# Altium PCB Bagryanets.PcbDoc
Units mm, origin at the board's own origin, x right, y up, seen from the top; angles counter-clockwise.
Board outline 60 x 79 mm, 2 copper layers (Top Layer, Bottom Layer), stack 1.236 mm thick; 82 components, 55 nets, 281 pads, 1 vias.
Unrouted connection lines stored in the file: 162.
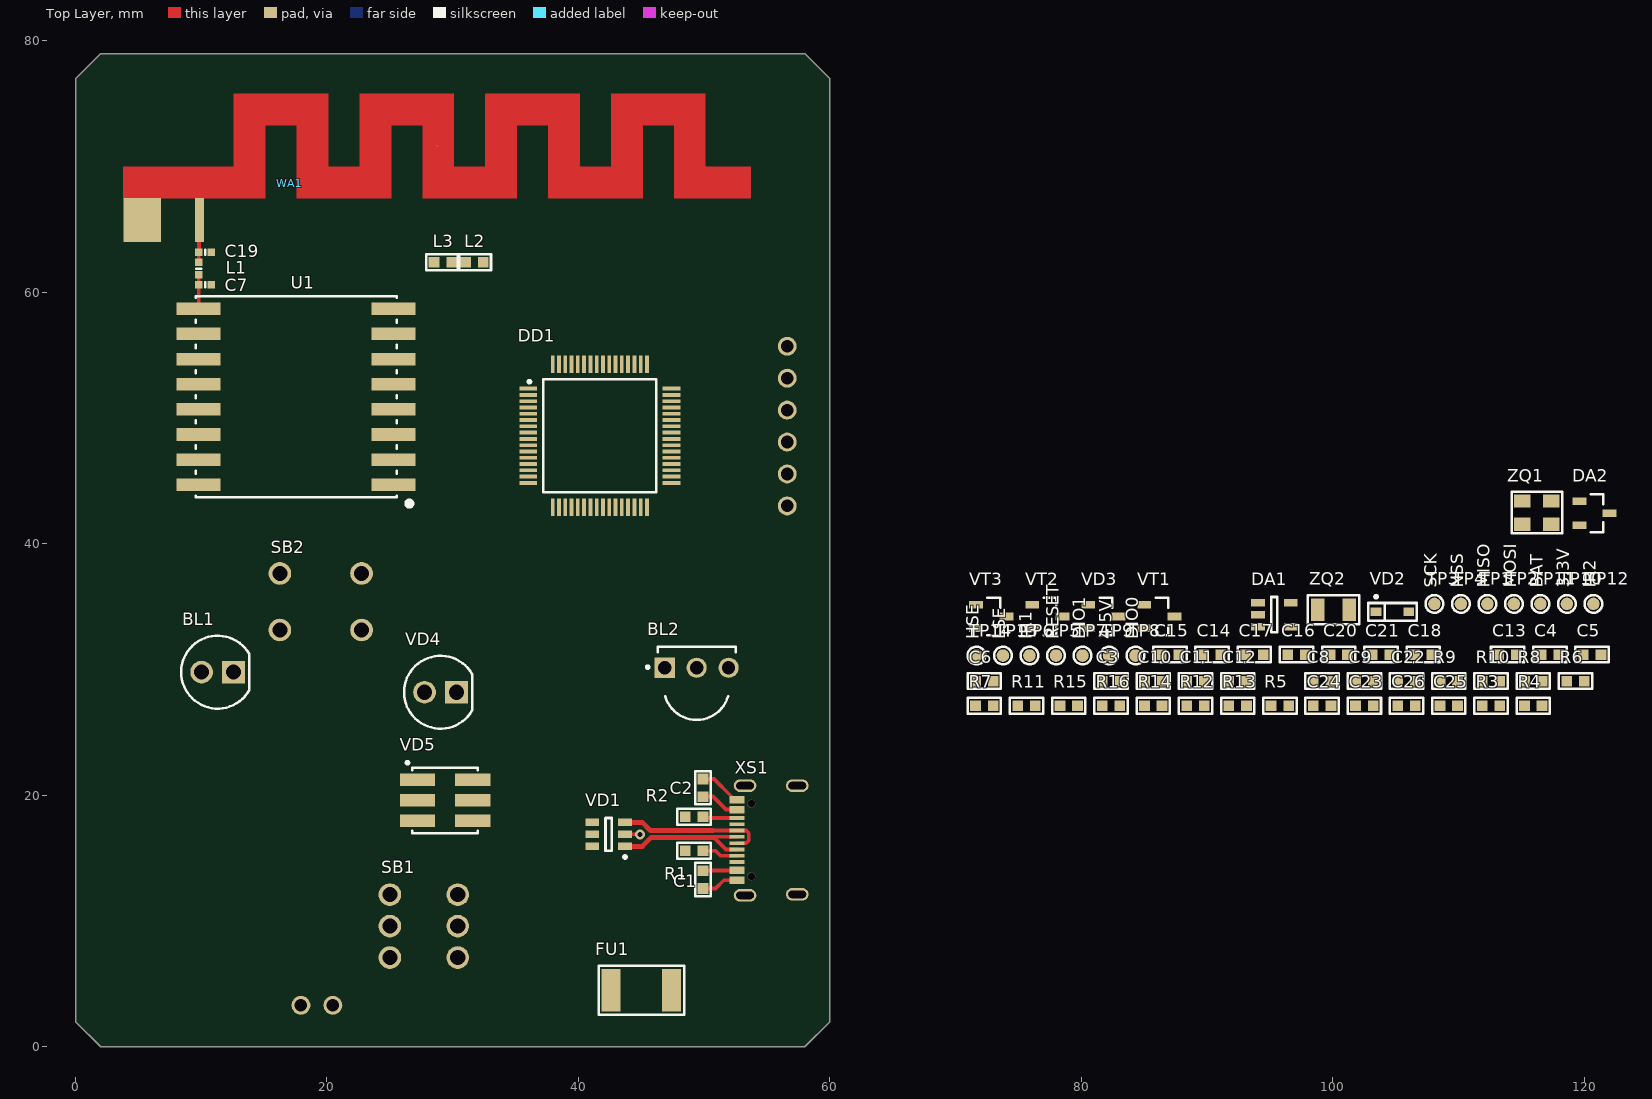
[diagram p0: Top Layer view]
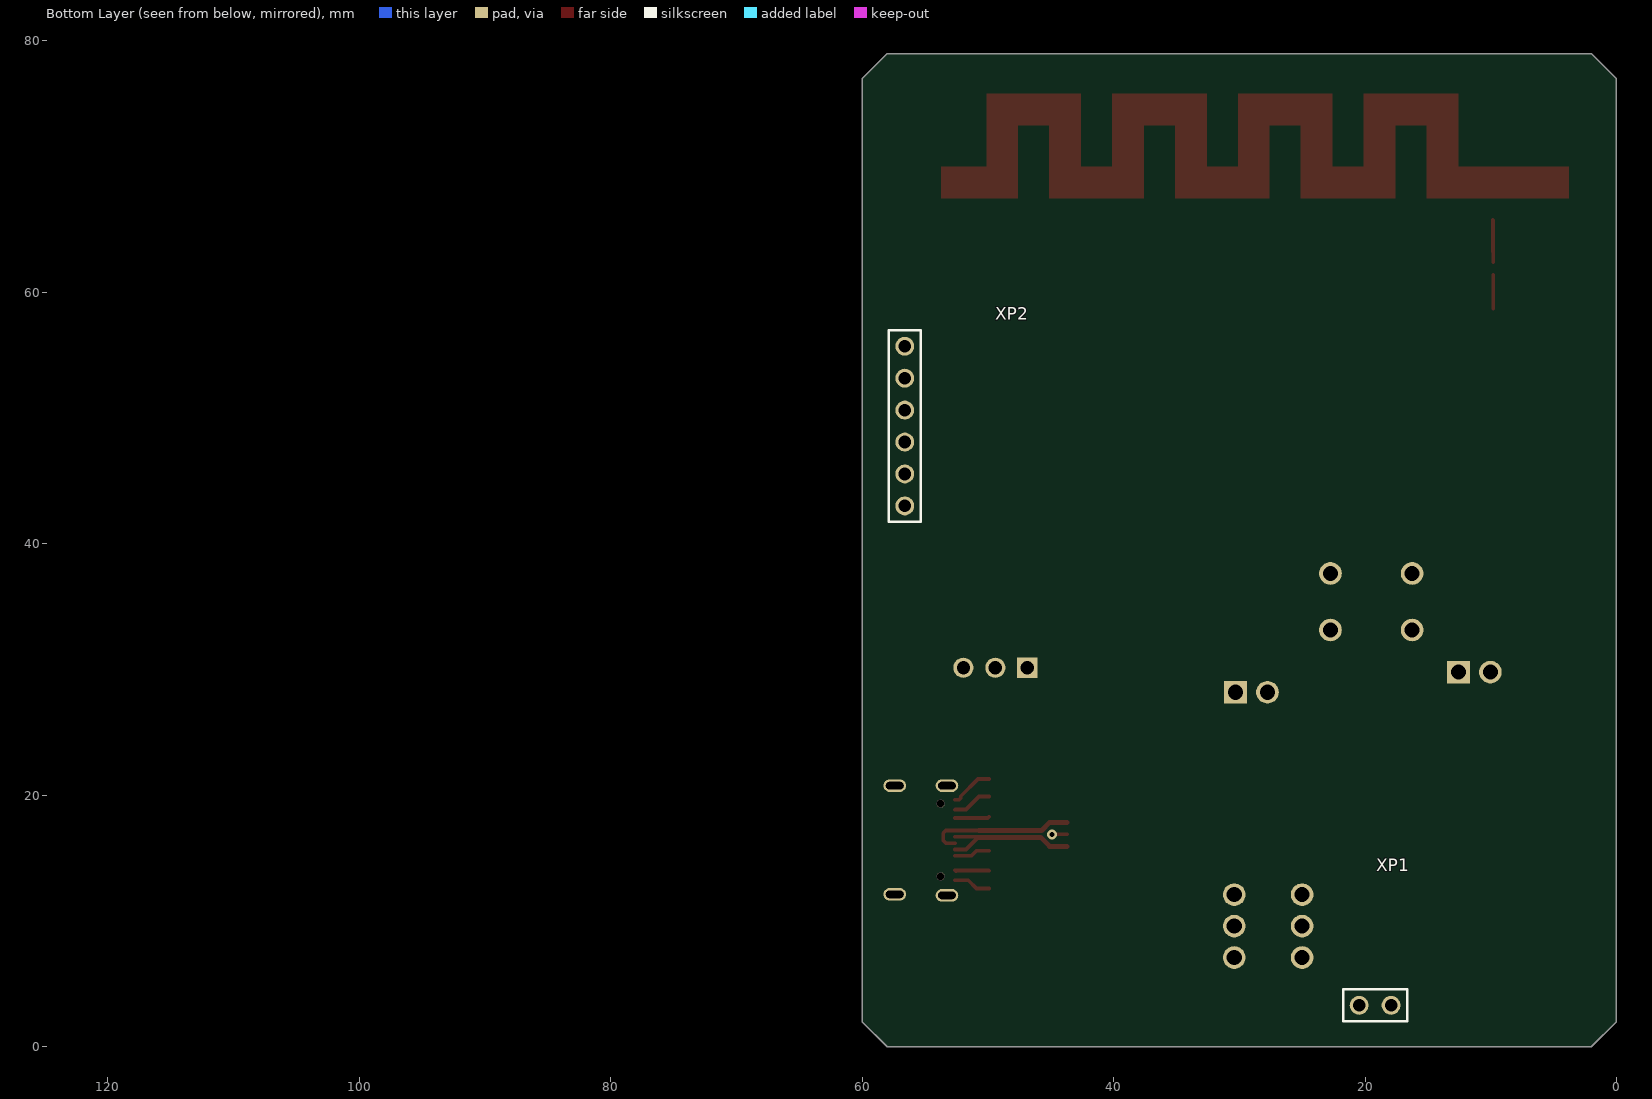
[diagram p1: Bottom Layer view, seen from below]

## Layer stack, top to bottom
Top Solder: solder mask 0.01, Solder Resist, Dk 3.5
Top Layer: signal copper 0.018
Dielectric 1: dielectric 1.2, FR-4, Dk 4.4
Bottom Layer: signal copper 0.018
Bottom Solder: solder mask 0.01, Solder Resist, Dk 3.5

## Board outline
2,0 0,2 0,77 2,79 58,79 60,77 60,2 58,0

## Design rules (kind name [scope] priority, off if disabled: settings)
BoardOutlineClearance [All] p1: gap=0.4 ignorepadtopadclearanceinfootprint=FALSE except(0: Arc-SplitContinuation Track-SplitContinuation SMDPad-SplitContinuation THPad-SplitContinuation Via-SplitContinuation Fill-OutlineEdge Fill-SplitContinuation Poly-OutlineEdge Poly-SplitContinuation Region-SplitContinuation Text-SplitContinuation)
Clearance [All] p1: gap=0.2 ignorepadtopadclearanceinfootprint=TRUE except(0.15: Arc-Arc Arc-Track Track-Track; 0.3: Arc-Hole Track-Hole SMDPad-Hole THPad-Hole Via-Hole Fill-Hole Poly-Hole Region-Hole Text-Hole)
DiffPairsRouting [All] p1: maxlimit=0.5 minlimit=0.15 mostfreqgap=0.15 toplayer_minwidth=0.3 toplayer_maxwidth=0.4 toplayer_prefwidth=0.4 bottomlayer_minwidth=0.3 bottomlayer_maxwidth=0.4 bottomlayer_prefwidth=0.4 impedanceprofiledriven=TRUE impedanceprofileid={C5B0D2AF-4300-4D82-8E32-3F2A2F164D85} impedanceprofilevalue=90.000000 maxuncoupledlength=12.7
HoleSize [All] p1: absolutevalues=TRUE maxlimit=3 minlimit=0.4 maxpercent=80.000 minpercent=20.000
HoleToHoleClearance [All] p1: gap=0.3 allowstackedmicrovias=FALSE
MinimumAnnularRing [All] p1: minimumring=0.15
MinimumSolderMaskSliver [All] p1: minsoldermaskwidth=0.2
PasteMaskExpansion [All] p1 off: expansion=-2539.975 usepaste=FALSE
PolygonConnect [All] p1: connectstyle=Relief reliefconductorwidth=0.254 reliefentries=4 polygonreliefangle="90 Angle" airgapwidth=0.254
RoutingVias [All] p1: holewidth=0.5 width=0.9 viastyle="Through Hole" minholewidth=0.4 minwidth=0.8 maxholewidth=0.6 maxwidth=1
SilkToSilkClearance [All] p1: silktosilkclearance=0.2
SolderMaskExpansion [All] p1: expansion=0 istentingtop=FALSE
UnRoutedNet [All] p1: checkbadconnections=TRUE
Width WidthBase [All] p1: maxlimit=1 minlimit=0.2 preferedwidth=0.3 minimp=50.000000 maximp=50.000000 favimp=50.000000
23 further rules are at their usual default settings.

## Classes and differential pairs
differential pair USB: +USB_P -USB_N
differential pair D: +D_P -D_N

## Components (designator, comment, footprint, x,y, rotation, side; value= is the part's Value field where it differs from the comment)
BL1 "SFH213A" LED_5mm 11.3,29.8 r0 top
BL2 "TSOP4836" TO92_TSOP4836 49.4,28.9 r270 top
C1 "100n" "CAP: 0603" 49.9,13.3 r270 top
C2 "100n" "CAP: 0603" 49.9,20.6 r270 top
C3 "100n" "CAP: 0603" 82.353,29.085 r0 top
C4 "100n" "CAP: 0603" 117.257,31.193 r0 top
C5 "100n" "CAP: 0603" 120.615,31.193 r0 top
C6 "100n" "CAP: 0603" 72.279,29.085 r0 top
C7 "*" "CAP: 0402" 10.3,60.6 r180 top
C8 "100n" "CAP: 0603" 99.143,29.085 r0 top
C9 "100n" "CAP: 0603" 102.501,29.085 r0 top
C10 "100n" "CAP: 0603" 85.711,29.085 r0 top
C11 "100n" "CAP: 0603" 89.069,29.085 r0 top
C12 "100n" "CAP: 0603" 92.427,29.085 r0 top
C13 "100n" "CAP: 0603" 113.899,31.193 r0 top
C14 "100n" "CAP: 0603" 90.393,31.193 r0 top
C15 "100n" "CAP: 0603" 87.035,31.193 r0 top
C16 "10u" "CAP: 0603" 97.109,31.193 r0 top
C17 "10u" "CAP: 0603" 93.751,31.193 r0 top
C18 "10u" "CAP: 0603" 107.183,31.193 r0 top
C19 "*" "CAP: 0402" 10.3,63.2 r180 top
C20 "680p" "CAP: 0603" 100.467,31.193 r0 top
C21 "1p" "CAP: 0603" 103.825,31.193 r0 top
C22 "100n" "CAP: 0603" 105.859,29.085 r0 top
C23 "18p" "CAP: 0603" 102.501,27.127 r0 top
C24 "18p" "CAP: 0603" 99.143,27.127 r0 top
C25 "18p" "CAP: 0603" 109.217,27.127 r0 top
C26 "18p" "CAP: 0603" 105.859,27.127 r0 top
DA1 "MCP6001" SOT23-5 95.344,34.376 r0 top
DA2 "MCP1700-3300" SOT23 120.805,42.434 r0 top
DD1 "STM32F072RBT6" 64-LQFP 41.7,48.6 r0 top
FU1 "MF-MSMF050" "FUSE: 1812" 45,4.5 r180 top
L1 "*" "IND: 0402" 9.8,61.9 r90 top
L2 "BLM18AG102" "IND: 0603" 31.72,62.394 r0 top
L3 "BLM18AG102" "IND: 0603" 29.212,62.394 r0 top
R1 "5,1k" "RES: 0603" 49.2,15.6 r0 top
R2 "5,1k" "RES: 0603" 49.2,18.3 r0 top
R3 "10k" "RES: 0603" 112.575,27.127 r0 top
R4 "100k" "RES: 0603" 115.933,27.127 r0 top
R5 "100k" "RES: 0603" 95.785,27.127 r0 top
R6 "100k" "RES: 0603" 119.291,29.085 r0 top
R7 "100k" "RES: 0603" 72.279,27.127 r0 top
R8 "1k" "RES: 0603" 115.933,29.085 r0 top
R9 "1k" "RES: 0603" 109.217,29.085 r0 top
R10 "1k" "RES: 0603" 112.575,29.085 r0 top
R11 "1k" "RES: 0603" 75.637,27.127 r0 top
R12 "1k" "RES: 0603" 89.069,27.127 r0 top
R13 "1k" "RES: 0603" 92.427,27.127 r0 top
R14 "1k" "RES: 0603" 85.711,27.127 r0 top
R15 "100" "RES: 0603" 78.995,27.127 r0 top
R16 "10" "RES: 0603" 82.353,27.127 r0 top
SB1 "KLS7-P8.5x8.5" SW-KLS7-P8.5x8.5 27.7,9.6 r0 top
SB2 "KLS7-TS6601-5.0-180" TactileButton6x6 19.5,35.4 r180 top
TP1 "MISO" Testpoint_1mm 112.284,35.226 r90 top
TP2 "MOSI" Testpoint_1mm 114.392,35.226 r90 top
TP3 "SCK" Testpoint_1mm 108.068,35.226 r90 top
TP4 "NSS" Testpoint_1mm 110.176,35.226 r90 top
TP5 "RESET" Testpoint_1mm 77.978,31.118 r90 top
TP6 "IR1" Testpoint_1mm 75.87,31.118 r90 top
TP7 "DIO1" Testpoint_1mm 80.086,31.118 r90 top
TP8 "DIO0" Testpoint_1mm 84.302,31.118 r90 top
TP9 "4.5V" Testpoint_1mm 82.194,31.118 r90 top
TP10 "3.3V" Testpoint_1mm 118.608,35.226 r90 top
TP11 "BAT" Testpoint_1mm 116.5,35.226 r90 top
TP12 "IR2" Testpoint_1mm 120.716,35.226 r90 top
TP13 "LSE" Testpoint_1mm 73.762,31.118 r90 top
TP14 "HSE" Testpoint_1mm 71.654,31.118 r90 top
U1 "RFM95W" Module_RFM95W 17.55,51.7 r180 top
VD1 "USBLC6-2SC6" SOT23-6 42.4,16.9 r180 top value=3.5pF
VD2 "BAT760" "DIODE: SOD323" 104.735,34.599 r0 top
VD3 "ESDA5V3L" SOT23 81.745,34.226 r0 top
VD4 "TSAL6200" LED_5mm 29.03,28.2 r0 top
VD5 "SMD05050C6" LED_5050 29.4,19.6 r0 top
VT1 "SI2302A" SOT23 86.203,34.226 r0 top
VT2 "SI2302A" SOT23 77.287,34.226 r0 top
VT3 "SI2302A" SOT23 72.829,34.226 r0 top
WA1 "Antenna" WA-Lora868 10.2,64 r180 top locked
XP1 "PLS-2R" PLS-2R 19.2,3.3 r180 bottom
XP2 "PLS-6R" PLS-6R 56.6,49.37 r270 bottom
XS1 "USB Type-C 16PF-015" USB-C_16PF-015 60,16.45 r90 top locked
ZQ1 "12MHZ" "OSC: 3225" 116.222,42.484 r0 top
ZQ2 "32,758kHz" "OSC: 3215" 100.052,34.776 r0 top

## Footprints (in the part's own frame and the unit in brackets; to place one, negate y for a bottom-side part, rotate by r counter-clockwise, add the part's x,y. Pads: shape width x height; smd on the part's side, far side on the other; paste and mask are expansions set on the pad)
64-LQFP [mm] "Thin QFP, 64-Leads, Body 10x10mm, Pitch 0.5mm, IPC Medium Density"
  rect 1.4x0.3 smd: 1(-5.7,3.75) 2(-5.7,3.25) 3(-5.7,2.75) 4(-5.7,2.25) 5(-5.7,1.75) 6(-5.7,1.25) 7(-5.7,0.75) 8(-5.7,0.25) 9(-5.7,-0.25) 10(-5.7,-0.75) 11(-5.7,-1.25) 12(-5.7,-1.75) 13(-5.7,-2.25) 14(-5.7,-2.75) 15(-5.7,-3.25) 16(-5.7,-3.75) 33(5.7,-3.75) 34(5.7,-3.25) 35(5.7,-2.75) 36(5.7,-2.25) 37(5.7,-1.75) 38(5.7,-1.25) 39(5.7,-0.75) 40(5.7,-0.25) 41(5.7,0.25) 42(5.7,0.75) 43(5.7,1.25) 44(5.7,1.75) 45(5.7,2.25) 46(5.7,2.75) 47(5.7,3.25) 48(5.7,3.75)
  rect 0.3x1.4 smd: 17(-3.75,-5.7) 18(-3.25,-5.7) 19(-2.75,-5.7) 20(-2.25,-5.7) 21(-1.75,-5.7) 22(-1.25,-5.7) 23(-0.75,-5.7) 24(-0.25,-5.7) 25(0.25,-5.7) 26(0.75,-5.7) 27(1.25,-5.7) 28(1.75,-5.7) 29(2.25,-5.7) 30(2.75,-5.7) 31(3.25,-5.7) 32(3.75,-5.7) 49(3.75,5.7) 50(3.25,5.7) 51(2.75,5.7) 52(2.25,5.7) 53(1.75,5.7) 54(1.25,5.7) 55(0.75,5.7) 56(0.25,5.7) 57(-0.25,5.7) 58(-0.75,5.7) 59(-1.25,5.7) 60(-1.75,5.7) 61(-2.25,5.7) 62(-2.75,5.7) 63(-3.25,5.7) 64(-3.75,5.7)
  round 0.5 on Mech6: ""(-5.4,5.4)
  silkscreen extent -5.7,-4.5 4.5,4.5, body extent -6,-6 6,6, height 1.5
"CAP: 0402" [mm]
  rect 0.6x0.6 smd: 1(-0.5,0) 2(0.5,0)
  silkscreen extent 0,-0.2 0,0.2, body extent -0.5,-0.25 0.5,0.25, height 0.5
"CAP: 0603" [mm]
  rect 0.85x0.85 smd: 1(-0.7,0) 2(0.7,0)
  silkscreen extent -1.33,-0.63 1.33,0.63, body extent -0.8,-0.41 0.8,0.41, height 0.78
"DIODE: SOD323" [mm]
  rect 0.85x0.7 smd: A(1.3,0) C(-1.3,0)
  silkscreen extent -1.92,-0.7 1.92,1.3, body extent -1.25,-0.63 1.25,0.63, height 1.1
"FUSE: 1812" [mm]
  rect 1.5x3.4 smd: 1(-2.4,0) 2(2.4,0)
  silkscreen extent -3.4,-1.95 3.4,1.95, body extent -2.41,-1.61 2.41,1.61, height 1.32
"IND: 0402" [mm]
  rect 0.6x0.6 smd: 1(-0.5,0) 2(0.5,0)
  silkscreen extent 0,-0.2 0,0.2, body extent -0.5,-0.25 0.5,0.25, height 0.5
"IND: 0603" [mm]
  rect 0.85x0.85 smd: 1(-0.7,0) 2(0.7,0)
  silkscreen extent -1.33,-0.63 1.33,0.63, body extent -0.8,-0.4 0.8,0.4, height 0.8
LED_5mm [mm] "THD, 2-Leads, Dia 5.8mm, Pitch 2.54mm"
  round 1.8 hole 1.2: A(-1.27,0)
  rect 1.8x1.8 hole 1.2: C(1.27,0)
  silkscreen extent -2.9,-2.9 2.51,2.9, body extent -2.98,-3.01 2.44,3.01, height 9.31
LED_5050 [mm] "SMT Mono-color TOP LED Waterclear, body 5x5mm"
  rect 2.8x1 smd: 1(-2.2,1.63) 2(-2.2,0) 3(-2.2,-1.63) 4(2.2,-1.63) 5(2.2,0) 6(2.2,1.63)
  silkscreen extent -3.1,-2.6 2.6,3.1, body extent -2.75,-2.5 2.75,2.5, height 1.4
Module_RFM95W [mm]
  rect 3.5x1 smd paste+0 mask+0: 1(-7.75,7) 2(-7.75,5) 3(-7.75,3) 4(-7.75,1) 5(-7.75,-1) 6(-7.75,-3) 7(-7.75,-5) 8(-7.75,-7) 9(7.75,-7) 10(7.75,-5) 11(7.75,-3) 12(7.75,-1) 13(7.75,1) 14(7.75,3) 15(7.75,5) 16(7.75,7)
  silkscreen extent -9.2,-8 8,8.7, body extent -9.6,-8.1 9.6,8.1, height 0.25
"OSC: 3215" [mm]
  rect 1.1x1.8 smd: 1(-1.25,0) 2(1.25,0)
  silkscreen extent -2.05,-1.15 2.05,1.15, body extent -1.6,-0.75 1.6,0.75, height 0.8
"OSC: 3225" [mm]
  rect 1.3x1.05 smd: 1(-1.15,-0.925) 2(1.15,-0.925) 3(1.15,0.925) 4(-1.15,0.925)
  round 0.5 on Top Overlay: ""(-2.3,-2)
  silkscreen extent -2,-1.65 2,1.65, body extent -1.6,-1.21 1.6,1.29, height 0.61
PLS-2R [mm]
  round 1.5 hole 1: 1(-1.27,0) 2(1.27,0)
  silkscreen extent -2.54,-1.27 2.54,1.27, body extent -2.54,-0.4 2.54,9.96, height 2.54
PLS-6R [mm]
  round 1.5 hole 1: 1(-6.35,0) 2(-3.81,0) 3(-1.27,0) 4(1.27,0) 5(3.81,0) 6(6.35,0)
  silkscreen extent -7.62,-1.27 7.62,1.27, body extent -7.62,-0.3 7.62,10.06, height 2.54
"RES: 0603" [mm]
  rect 0.85x0.85 smd: 1(-0.7,0) 2(0.7,0)
  silkscreen extent -1.33,-0.63 1.33,0.63, body extent -0.8,-0.4 0.8,0.4, height 0.44
SOT23 [mm]
  rect 1.1x0.6 smd: 1(-1.2,0.95) 2(-1.2,-0.95) 3(1.2,0)
  round 0.5 on Mech6: ""(-0.9,1.1)
  silkscreen extent -0.3,-1.5 0.7,1.5, body extent -1.32,-1.52 1.32,1.52, height 1.12
SOT23-5 [mm] "pitch 0.95 mm"
  rect 1.1x0.6 smd: 1(-1.3,0.95) 2(-1.3,0) 3(-1.3,-0.95) 4(1.3,-0.95) 5(1.3,0.95)
  round 0.5 on Mech6: ""(-1.1,1.1)
  silkscreen extent -0.25,-1.4 0.25,1.4, body extent -1.5,-1.5 1.5,1.5, height 1.3
SOT23-6 [mm] "pitch 0.95 mm"
  rect 1.1x0.6 smd: 1(-1.3,0.95) 2(-1.3,0) 3(-1.3,-0.95) 4(1.3,-0.95) 5(1.3,0) 6(1.3,0.95)
  round 0.5 on Mech6: ""(-1,1.1)
  silkscreen extent -1.4,-1.3 0.25,1.9, body extent -1.4,-1.45 1.4,1.45, height 1.45
SW-KLS7-P8.5x8.5 [mm]
  round 1.8 hole 1.2: 1(-2.7,2.5) 2(-2.7,0) 3(-2.7,-2.5) 4(2.7,2.5) 5(2.7,0) 6(2.7,-2.5)
  body extent -3.5,-3.5 3.5,3.5, height 13
TactileButton6x6 [mm]
  round 1.8 hole 1.2: 1(-3.25,2.25) 2(3.25,2.25) 3(3.25,-2.25) 4(-3.25,-2.25)
  body extent -3.85,-3 3.85,3, height 4.95
Testpoint_1mm [mm]
  round 1 smd: 1(0,0)
  silkscreen extent -0.7,-0.7 0.7,0.7
TO92_TSOP4836 [mm]
  rect 1.6x1.6 hole 1.05 paste-2539.97 mask+0: 1(-1.25,-2.54)
  round 1.6 hole 1.05 paste-2539.97 mask+0: 2(-1.25,0) 3(-1.25,2.54)
  silkscreen extent -2.9,-4 2.9,3.1, body extent -3,-3.44 3,3.44, height 0.25
USB-C_16PF-015 [mm]
  round 0.65 hole 0.65 unplated: 0(-2.89,6.25) 0(2.89,6.25)
  rect 0.6x1.2 smd: A1B12(-3.2,7.4) A4B9(-2.4,7.4) B1A12(3.2,7.4) B4A9(2.4,7.4)
  rect 0.3x1.2 smd: A5(-1.25,7.4) A6(-0.25,7.4) A7(0.25,7.4) A8(1.25,7.4) B5(1.75,7.4) B6(0.75,7.4) B7(-0.75,7.4) B8(-1.75,7.4)
  oval 1x1.8 hole 0.6 slot 1.4 at 90 deg: SHLD1(4.32,2.6) SHLD2(4.32,6.75) SHLD3(-4.32,2.6) SHLD4(-4.4,6.75)
  body extent -4.47,-0.02 4.47,7.76, height 3.31
WA-Lora868 [mm]
  round 0.025 smd: 0(-18.55,-7.65)
  rect 0.7x3.5 smd: 1(0.35,-1.75)
  rect 3x3.5 smd: 2(4.9,-1.75)
  Top Layer region: -43.5,-6 -39.9,-6 -39.9,-11.8 -32.4,-11.8 -32.4,-6 -29.9,-6 -29.9,-11.8 -22.4,-11.8 -22.4,-6 -19.9,-6 -19.9,-11.8 -12.4,-11.8 -12.4,-6 -9.9,-6 -9.9,-11.8 -2.4,-11.8 -2.4,-6 6.4,-6 6.4,-3.5 3.4,-3.5 0.7,-3.5 0,-3.5 -4.9,-3.5 -4.9,-9.3 -7.4,-9.3 -7.4,-3.5 -14.9,-3.5 -14.9,-9.3 -17.4,-9.3 -17.4,-3.5 -24.9,-3.5 -24.9,-9.3 -27.4,-9.3 -27.4,-3.5 -34.9,-3.5 -34.9,-9.3 -37.4,-9.3 -37.4,-3.5 -43.5,-3.5

## Part data
BL1: library part BL-Photodiod
BL2: library part BL-TSOP4836
C1 C2 C3 C4 C5 C6 C7 C8 C9 C10 C11 C12 C13 C14 C15 C16 C17 C18 C19 C20 C21 C22 C23 C24 C25 C26: library part C-Capacitor
DA1: library part DA-MCP6001UT-I/OT, "IC OPAMP GP 1 CIRCUIT SOT23-5", Case/Package=SOT-23, Input Bias Current=1pA, Input Offset Voltage (Vos)=4.5mV, Max Operating Temperature=85°C, Max Supply Voltage=6V, Min Operating Temperature=-40°C, Min Supply Voltage=1.8V, Nominal Supply Current=100uA, Operating Supply Voltage=5.5V, Output Current=23mA, Package Quantity=1, Power Supply Rejection Ratio (PSRR)=86dB, Voltage Gain=112dB, Bandwidth=1MHz, Common Mode Rejection Ratio=60dB, Contact Plating=Tin, Gain Bandwidth Product=1MHz, Height=1.3mm, Lead Free="Lead Free", Length=3.1mm, Mount="Surface Mount", Number of Amplifiers=1, Number of Channels=1, Number of Circuits=1, Number of Elements=1, Number of Pins=5, Operating Supply Current=100uA, Output Current per Channel=23mA, Packaging="Tape and Reel", Radiation Hardening=No, REACH SVHC="No SVHC", Slew Rate=0.6V/µs, Unity Gain Bandwidth Product=1MHz, Voltage=6V, Width=1.8mm
DA2: library part DA-MCP1700-3300
DD1: library part DD-STM32F072RBT6, "ARM® Cortex®-M0 STM32 F0 Microcontroller IC 32-Bit 48MHz 128KB (128K x 8) FLASH 64-LQFP (10x10)", I/Os (High Current)=37, Manufacturer=STMicroelectronics, Operating Frequency(F) (Processor speed) (MHz)=72, PartNumber=STM32F103CBT6TR, Supplier Part Number=9074757P, Supply Voltage(Vcc) min (V)=2, A/D Converter="2x12-bit (10 Channel)", Category=Microcontrollers, ComponentLink1Description="Manufacturer URL", ComponentLink1URL=http://www.st.com/web/en/home.html, ComponentLink2Description=Datasheet, ComponentLink2URL=http://www.st.com/st-web-ui/static/active/en/resource/technical/document/datasheet/CD00161566.pdf, ComponentLink3Description="Package Specification", ComponentLink3URL=http://www.st.com/st-web-ui/static/active/en/resource/technical/document/datasheet/DM00058181.pdf, ComponentLink4Description=https://datasheet.ciiva.com/48492/dm00090510-48492217.pdf?src-supplier=Avnet, ComponentLink4URL=https://datasheet.ciiva.com/48492/dm00090510-48492217.pdf?src-supplier=Avnet, Core="ARM Cortex-M3", DatasheetVersion="Rev. 16", FLASH Size (Prog) (kB)=128, Internal RAM Size (kB)=20, Manufacturer Part Number=STM32F072RBT6, Mounting Technology="Surface Mount", PackageDescription="48-Pin Low Profile Quad Flat Package, 7 x 7 mm Body, 0.5 mm Pitch", PackageReference=LQFP48, PackageVersion="Rev. 6, 06/2013", Packing="Tape and Reel", Pricing="10=4,9, 100=4,245, 250=4,04, 500=3,63 (GBP)", RoHS=Yes, Stock=2446, Supplier=Rs
FU1: library part FU-Fuse
L1 L2 L3: library part L-Inductor
R1 R2 R3 R4 R5 R6 R7 R8 R9 R10 R11 R12 R13 R14 R15 R16: library part R-Resistor
SB1: library part SW-SPDT_2
SB2: library part SW-PB
TP1 TP2 TP3 TP4 TP5 TP6 TP7 TP8 TP9 TP10 TP11 TP12 TP13 TP14: library part TP-Testpoint
U1: library part MOD-RFM95W, "Rfm95W LoRa Transceiver Module 868Mhz", Clock Frequency=868MHz, Current - Receiving=12.1mA, Current - Transmitting=120mA, Max Supply Voltage=3.7V, Min Supply Voltage=1.8V, Nominal Supply Current=5.8mA, ComponentLink1Description="Manufacturer URL", ComponentLink1URL=http://www.st.com/web/en/home.html, ComponentLink2Description=Datasheet, ComponentLink2URL=http://www.st.com/st-web-ui/static/active/en/resource/technical/document/datasheet/CD00161566.pdf, ComponentLink3Description="Package Specification", ComponentLink3URL=http://www.st.com/st-web-ui/static/active/en/resource/technical/document/datasheet/DM00058181.pdf, ComponentLink4Description=https://www.rfsolutions.co.uk/downloads/1463993415RFM95_96_97_98W.pdf?src-supplier=Digikey, ComponentLink4URL=https://www.rfsolutions.co.uk/downloads/1463993415RFM95_96_97_98W.pdf?src-supplier=Digikey, Height=1.8mm, Number of GPIO=6NUMBER, Sensitivity=-123dBm
VD1: library part VD-USBLC6-2SC6, "ESD Suppressor Diode Arrays Uni-Dir 15kV@Air Gap/8kV@Contact Disc 6-Pin SOT-23 T/R", Breakdown Voltage=6V, Case/Package=SOT-23, Clamping Voltage=17V, Leakage Current=150nA, Manufacturer=STMicroelectronics, Max Operating Temperature=125°C, Max Repetitive Reverse Voltage (Vrrm)=5.25V, Min Operating Temperature=-40°C, Operating Supply Voltage=1.1V, Package Quantity=3000, Peak Pulse Current=5A, Power Line Protection=Yes, Supplier Part Number=6247693P, Test Current=1mA, Working Voltage=5V, Category="TVS Diodes", Clamping Voltage-Max=17V, ComponentLink1Description=https://datasheet.ciiva.com/1268/1690354-1268384.pdf?src-supplier=Element14, ComponentLink1URL=https://datasheet.ciiva.com/1268/1690354-1268384.pdf?src-supplier=Element14, ComponentLink2Description=https://datasheet.ciiva.com/4508/cd00050750-113117-4508433.pdf?src-supplier=Mouser, ComponentLink2URL=https://datasheet.ciiva.com/4508/cd00050750-113117-4508433.pdf?src-supplier=Mouser, ComponentLink3Description=https://datasheet.ciiva.com/15143/getdatasheetpartid-148465-15143789.pdf?src-supplier=Verical, ComponentLink3URL=https://datasheet.ciiva.com/15143/getdatasheetpartid-148465-15143789.pdf?src-supplier=Verical, ComponentLink4Description=https://datasheet.ciiva.com/16200/cd00050750-16200026.pdf?src-supplier=Future+Electronics, ComponentLink4URL=https://datasheet.ciiva.com/16200/cd00050750-16200026.pdf?src-supplier=Future+Electronics, ComponentLink5Description=https://datasheet.ciiva.com/41444/001184109-da-01-en-ic-esd-protecti-usblc6-2sc6-sot-23-6-stm-41444156.pdf?src-supplier=Conrad, ComponentLink5URL=https://datasheet.ciiva.com/41444/001184109-da-01-en-ic-esd-protecti-usblc6-2sc6-sot-23-6-stm-41444156.pdf?src-supplier=Conrad, Data Rate=480Mbps, Depth=1.75mm, Direction=Unidirectional,Bidirectional, ESD Protection=Yes, Height=1.3mm, Lead Free="Lead Free", Length=3.05mm, Manufacturer Part Number=USBLC6-2SC6, Max Breakdown Voltage=6V, Max Reverse Leakage Current=150nA, Min Breakdown Voltage=6V, Mounting Technology="Surface Mount", Number of Bidirectional Channels=2, Number of Channels=2, Number of Elements=1, Packaging="Tape and Reel", Pins=6, Polarity=Unidirectional,Bidirectional, Pricing="10=101,409, 50=95,548, 100=90,505, 250=85,325, 500=81,1 (RUB)", Radiation Hardening=No, Reach SVHC Compliant=No, Reverse Breakdown Voltage=6V, Reverse Standoff Voltage=5.25V, RoHS=Yes, RoHS Compliant=Yes, Series=USB, Stock=6950, Supplier=Rs, Termination=SMD/SMT, Width=1.75mm
VD2: library part VD-Schottky
VD3: library part VD-ESDA5V3L
VD4: library part HL-LED
VD5: library part HL-LED_6
VT1 VT2 VT3: library part VT-N-FET-GSD
WA1: library part WA-Antenna_2pin
XP1: library part XP-ConnectorPin-2_Table
XP2: library part XP-ConnectorPin-6_Table
XS1: library part XS-ConnectorUSB_C-16
ZQ1: library part ZQ-XTAL_4
ZQ2: library part ZQ-XTAL_2

## Via types
v1: diameter 0.8, hole 0.4, Top Layer to Bottom Layer, 1 vias

## Nets (pads, with @x,y where several pads share a name; then routed paths per layer and width w, separated by ;. In a path a pad name is that pad's centre, name@x,y a point inside that pad or via, vN(x,y) a via of type N, cw(c..) or ccw(c..) an arc to the next point about the centre after c; other vN are vias at no path point)
3.3V: C10.2 C11.2 C12.2 C13.2 C14.2 C16.2 C17.2 DA1.5 DA2.2 DD1.1 DD1.19 DD1.32 DD1.48 DD1.64 L2.1 R15.1 TP10.1 XP2.1
4.5V: C4.2 DA2.3 R6.1 TP9.1 VD2.C VD4.A VT1.3
BAT: C3.2 SB1.1 SB1.4 TP11.1 VD3.1 VT1.2
BatCtrl: C8.2 DD1.26 R6.2 R7.1
Buzzer: DD1.27 VT3.1
D_N: VD1.1 XS1.A7 XS1.B7 | length 11.4
  Top Layer w0.3: 50.762,16.662 50.8,16.7 XS1.A7 ; 50.825,16.6 51.725,15.7 XS1.B7
  Top Layer w0.4: VD1.1 45.081,15.95 45.794,16.662 50.762,16.662
D_P: VD1.3 XS1.A6 XS1.B6 | length 11.8
  Top Layer w0.3: 50.7,17.212 50.712,17.2 XS1.B6 53.345,17.2 53.55,16.995 53.55,16.405 53.345,16.2 XS1.A6
  Top Layer w0.4: VD1.3 45.081,17.85 45.719,17.212 50.7,17.212
GND: BL1.A BL2.2 C1.2 C2.1 C3.1 C4.1 C5.1 C6.2 C7.1 C8.1 C9.1 C10.1 C11.1 C12.1 C13.1 C14.1 C16.1 C17.1 C19.1 C20.1 C22.1 C23.2 C24.2 C25.1 C26.1 DA1.2 DA2.1 DD1.18 DD1.31 DD1.47 DD1.60 DD1.63 L3.1 R1.1 R2.1 R3.2 R4.1 R7.2 SB2.1 SB2.2 U1.1 U1.8 U1.10 VD1.2 VD3.2 VD3.3 VD5.1 VD5.2 VD5.3 VT2.2 VT3.2 WA1.2 XP1.2 XP2.3 XS1.A1B12 XS1.B1A12 ZQ1.2 ZQ1.4 | length 7.6
  Top Layer w0.3: VD1.2 v1(44.9,16.9) ; C1.2 50.9,12.6 51.55,13.25 XS1.A1B12 ; C2.1 50.775,21.3 52.15,19.925 52.15,19.8 52.3,19.65 XS1.B1A12
IR1: C20.2 DD1.15 R8.1 TP6.1
IR2: BL2.1 DD1.16 TP12.1
IR_OUT: DD1.41 VT2.1
L.DIO0: DD1.8 TP8.1 U1.14
L.DIO1: DD1.9 TP7.1 U1.15
L.MISO: DD1.22 TP1.1 U1.2
L.MOSI: DD1.23 TP2.1 U1.3
L.NSS: DD1.20 TP4.1 U1.5
L.RESET: DD1.14 TP5.1 U1.6
L.SCK: DD1.21 TP3.1 U1.4
LED_B: DD1.39 R11.1
LED_G: DD1.38 R10.1
LED_R: DD1.37 R9.1
NetBL1_C: BL1.C C21.2 DA1.4 R5.2
NetBL2_3: BL2.3 C22.2 R15.2
NetC1_1: C1.1 C2.2 FU1.1 XS1.A4B9 XS1.B4A9 | length 5.9
  Top Layer w0.3: C1.1 49.925,14.025 52.475,14.025 52.525,13.975 XS1.A4B9 ; C2.2 50.7,19.9 51.726,18.874 52.576,18.874 XS1.B4A9
NetC5_2: C5.2 U1.13
NetC6_1: C6.1 DA1.3 R4.2
NetC7_2: C7.2 L1.1 U1.9 | length 2.7
  Top Layer w0.3: U1.9 C7.2 L1.1
NetC15_1: C15.1 C18.1 DD1.12 L3.2
NetC15_2: C15.2 C18.2 DD1.13 L2.2
NetC19_2: C19.2 L1.2 WA1.1 | length 3.4
  Top Layer w0.3: L1.2 C19.2 9.825,63.225 9.825,65.725 WA1.1
NetC21_1: C21.1 DA1.1 R5.1 R8.2
NetC25_2: C25.2 R12.2 ZQ1.1
NetC26_2: C26.2 R13.2 ZQ2.1
NetFU1_2: FU1.2 R3.1 VD1.5 VD2.A VT1.1
NetHA1_2: R14.1
NetR1_2: R1.2 XS1.A5 | length 2.9
  Top Layer w0.3: R1.2 50.9,15.6 51.3,15.2 XS1.A5
NetR2_2: R2.2 XS1.B5 | length 2.7
  Top Layer w0.3: R2.2 50,18.2 XS1.B5
NetR9_2: R9.2 VD5.4
NetR10_2: R10.2 VD5.5
NetR11_2: R11.2 VD5.6
NetR14_2: R14.2 VT3.3
NetR16_1: R16.1 VD4.C
NetR16_2: R16.2 VT2.3
NetSB1_2: SB1.2 SB1.5 XP1.1
OSC32_IN: C24.1 DD1.4 TP14.1 ZQ2.2
OSC32_OUT: DD1.54 R13.1
OSC_IN: C23.1 DD1.5 TP13.1 ZQ1.3
OSC_OUT: DD1.6 R12.1
RST: C9.2 DD1.7 SB2.3 SB2.4
SWCLK: DD1.49 XP2.2
SWDIO: DD1.46 XP2.4
UART_RX: DD1.43 XP2.6
UART_TX: DD1.42 XP2.5
USB_N: DD1.44 VD1.6
USB_P: DD1.45 VD1.4
pads on no net: DA1. DA2. DD1. DD1.2 DD1.3 DD1.10 DD1.11 DD1.17 DD1.24 DD1.25 DD1.28 DD1.29 DD1.30 DD1.33 DD1.34 DD1.35 DD1.36 DD1.40 DD1.50 DD1.51 DD1.52 DD1.53 DD1.55 DD1.56 DD1.57 DD1.58 DD1.59 DD1.61 DD1.62 SB1.3 SB1.6 U1.7 U1.11 U1.12 U1.16 VD1. VD3. VT1. VT2. VT3. WA1.0 XS1.0 XS1.A8 XS1.B8 XS1.SHLD1 XS1.SHLD2 XS1.SHLD3 XS1.SHLD4 ZQ1.

## Polygon pours and split planes (outlines as drawn)
no net on Top Solder (solid): 60,64 60,77 58,79 2,79 0,77 0,64

## Dimensions
58,0 to 57,12 on Top Overlay
0,77 to 30,77 on Top Overlay
0,77 to 60,77 on Top Overlay
58,79 to 57,64 on Top Overlay
58,0 to 58,79 on Top Overlay